# EAGLE board schematic (EAGLE 9.6.2)
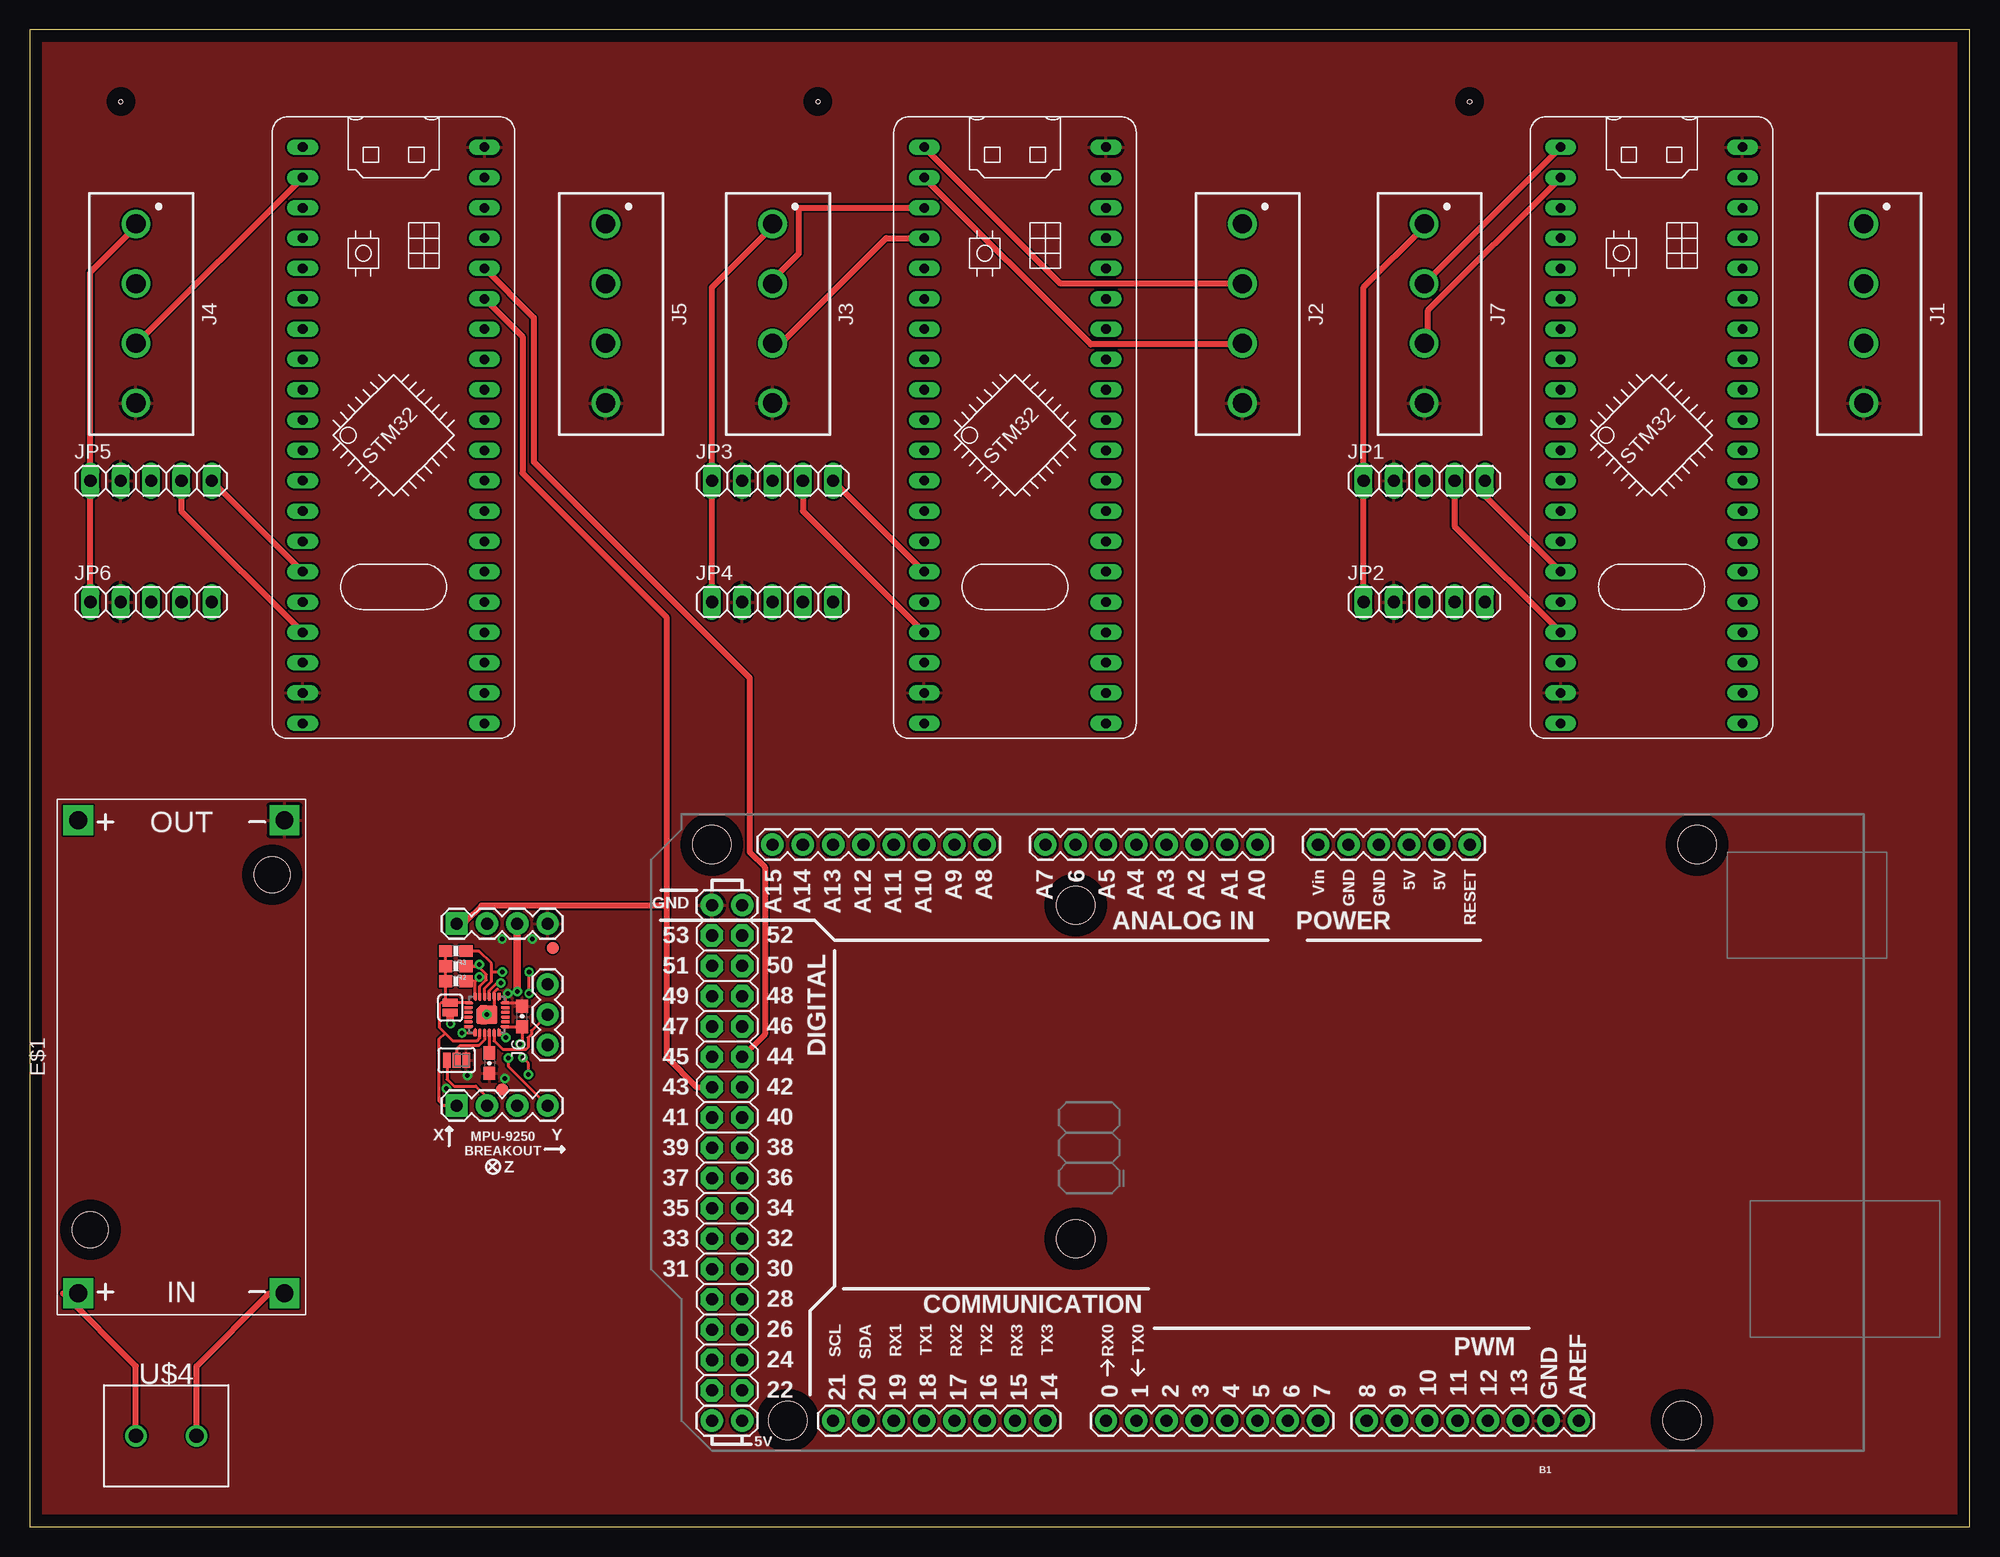
[diagram p0: board, top side]
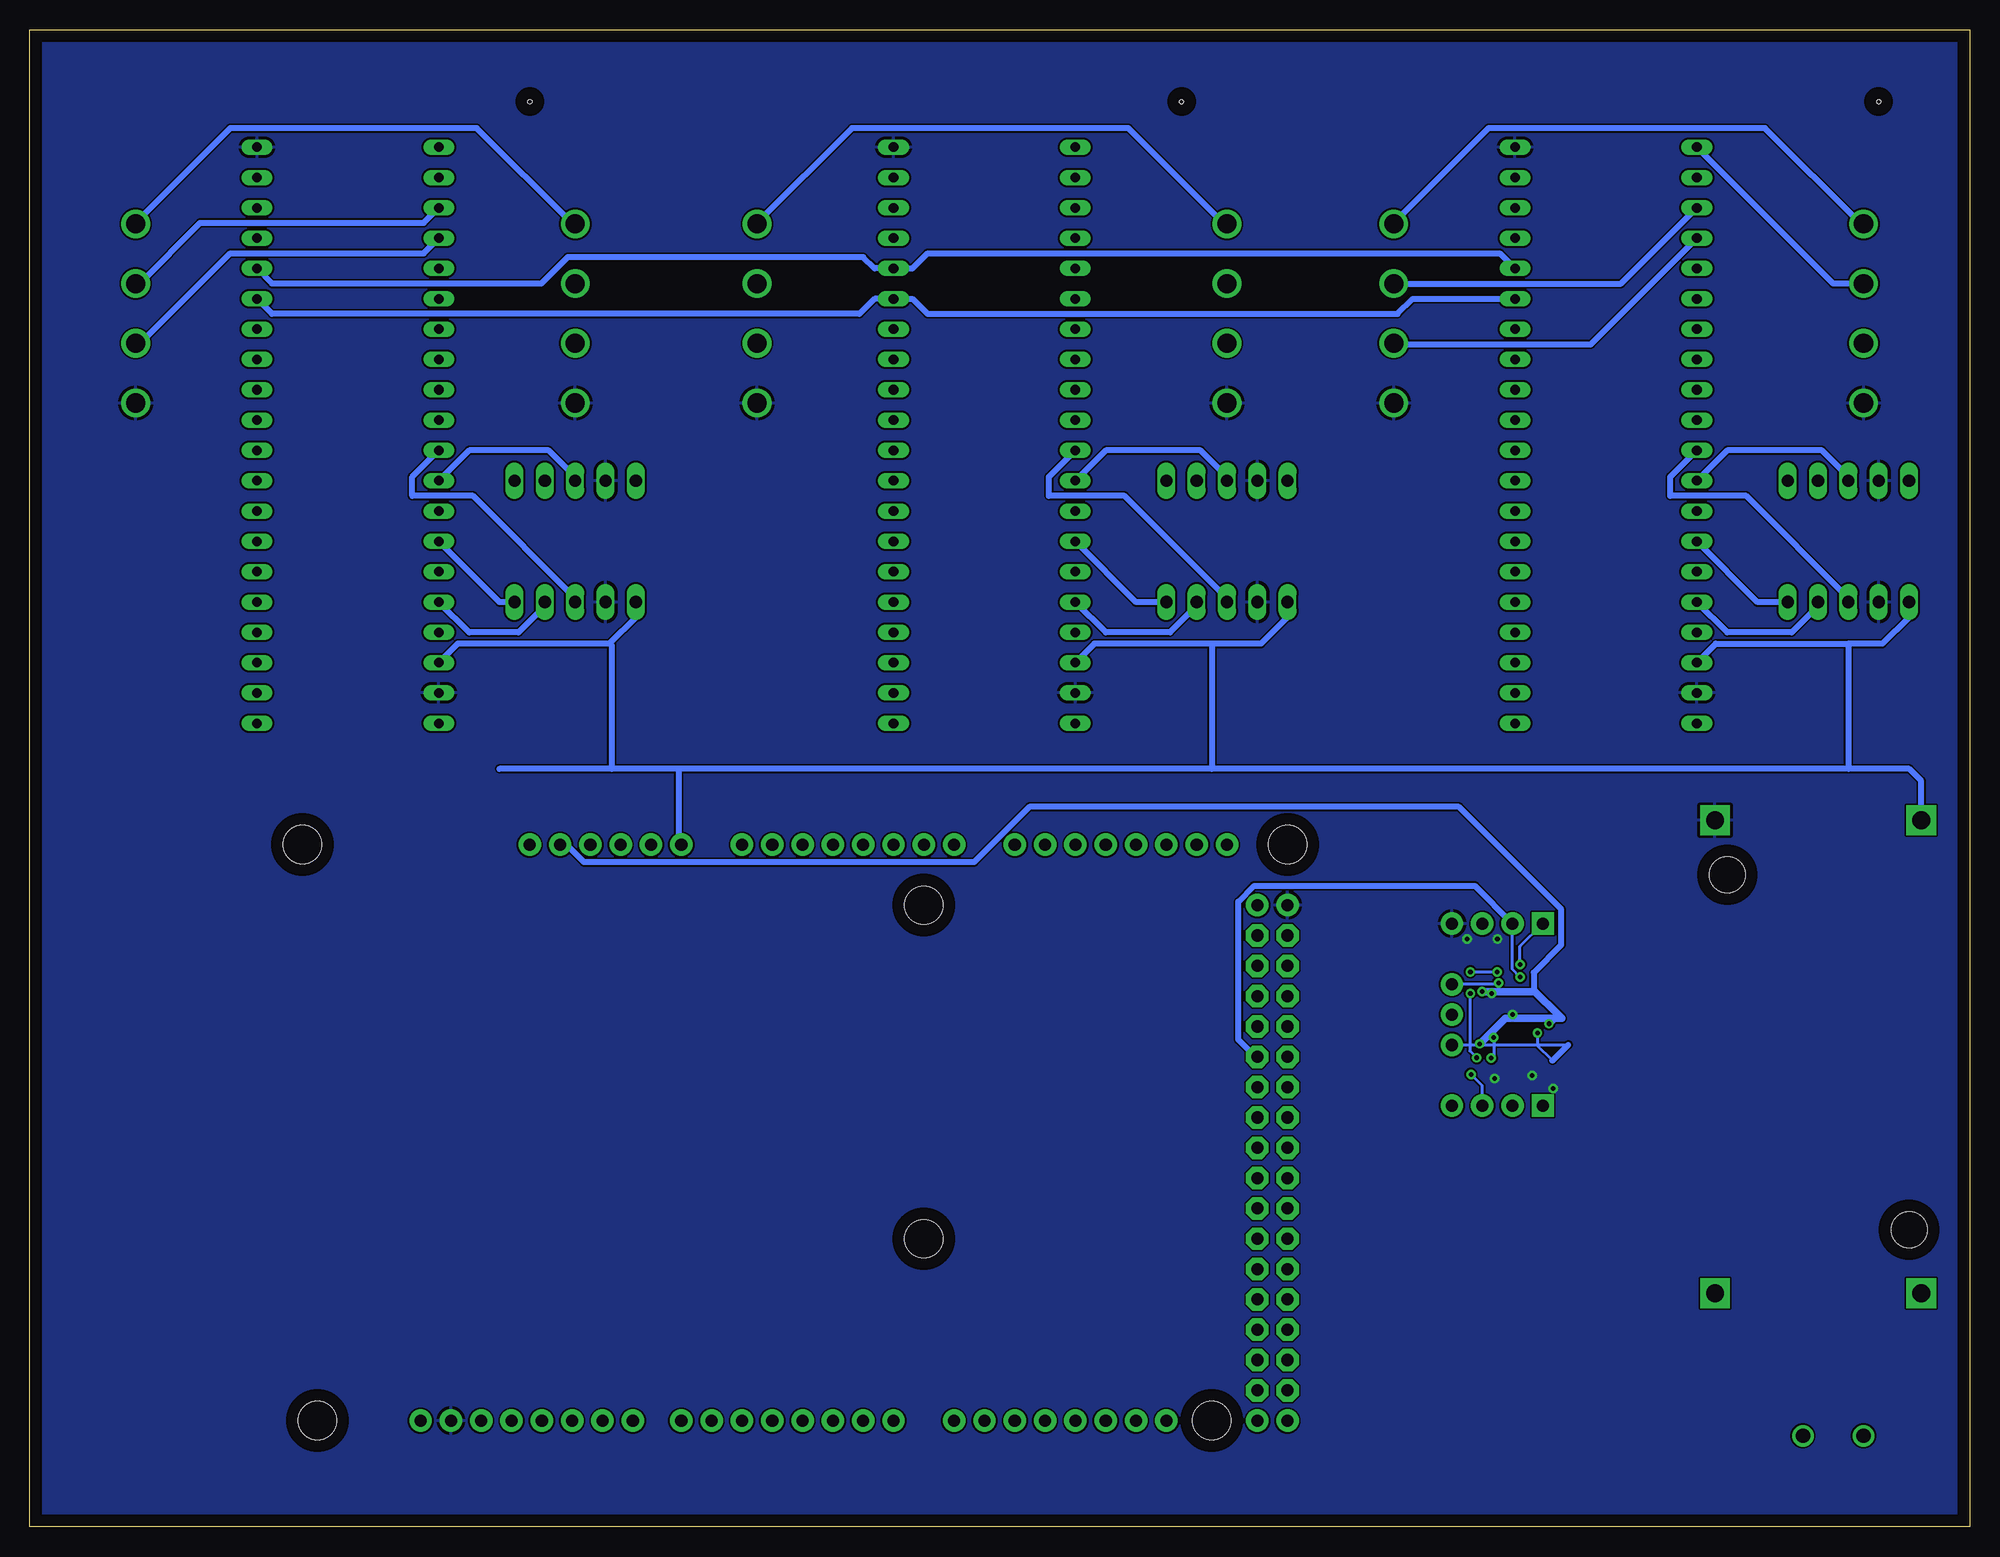
[diagram p1: board, bottom side, seen from below]

Size 162.54 x 125.4 mm. Coordinates in mm from the lower left corner, seen from the top.
Outline: 0,0 162.54,0 162.54,125.4 0,125.4 0,0
Copper layers (1*16): Top 0.035mm / dielectric 1.5mm / Bottom 0.035mm
Design rules "default *": minimum track width 20mil, minimum drill 0.35mm, track to track 6mil, track to pad 6mil, pad to pad 6mil, via to via 6mil, smd to smd 6mil, copper to edge 40mil, drill to drill 6mil, minimum pad ring 10mil, minimum via ring 8mil, stop-mask expansion 4mil, vias tented up to drill 0mil, thermal gap 10mil
Holes 0.35 mm at 7.62,119.38 66.04,119.38 120.65,119.38

## Footprints (pad centres in the part's own frame; a part is rotated, then mirrored left to right if it is on the bottom)
ARDUINO_MEGA = drill 1.016 pad 1.88: 0 13.97,24.13; 1 11.43,24.13; 2 8.89,24.13; 3 6.35,24.13; 3.3V -13.97,-24.13; 4 3.81,24.13; 5 1.27,24.13; 5V@0 -11.43,-24.13; 5V@1 44.45,24.13; 5V@2 46.99,24.13; 6 -1.27,24.13; 7 -3.81,24.13; 8 -7.874,24.13; 9 -10.414,24.13; 10 -12.954,24.13; 11 -15.494,24.13; 12 -18.034,24.13; 13 -20.574,24.13; 14 19.05,24.13; 15 21.59,24.13; 16 24.13,24.13; 17 26.67,24.13; 18 29.21,24.13; 19 31.75,24.13; 20 34.29,24.13; 21 36.83,24.13; A0 1.27,-24.13; A1 3.81,-24.13; A2 6.35,-24.13; A3 8.89,-24.13; A4 11.43,-24.13; A5 13.97,-24.13; A6 16.51,-24.13; A7 19.05,-24.13; A8 24.13,-24.13; A9 26.67,-24.13; A10 29.21,-24.13; A11 31.75,-24.13; A12 34.29,-24.13; A13 36.83,-24.13; A14 39.37,-24.13; A15 41.91,-24.13; AREF -25.654,24.13; GND@0 -8.89,-24.13; GND@1 -6.35,-24.13; GND@2 44.45,-19.05; GND@3 46.99,-19.05; GND@4 -23.114,24.13; RESET -16.51,-24.13; VIN -3.81,-24.13 | drill 1.016 pad 1.88 octagon: 22 44.45,21.59; 23 46.99,21.59; 24 44.45,19.05; 25 46.99,19.05; 26 44.45,16.51; 27 46.99,16.51; 28 44.45,13.97; 29 46.99,13.97; 30 44.45,11.43; 31 46.99,11.43; 32 44.45,8.89; 33 46.99,8.89; 34 44.45,6.35; 35 46.99,6.35; 36 44.45,3.81; 37 46.99,3.81; 38 44.45,1.27; 39 46.99,1.27; 40 44.45,-1.27; 41 46.99,-1.27; 42 44.45,-3.81; 43 46.99,-3.81; 44 44.45,-6.35; 45 46.99,-6.35; 46 44.45,-8.89; 47 46.99,-8.89; 48 44.45,-11.43; 49 46.99,-11.43; 50 44.45,-13.97; 51 46.99,-13.97; 52 44.45,-16.51; 53 46.99,-16.51 | hole 3.2: -34.29,24.13; -35.56,-24.13; 16.51,8.89; 16.51,-19.05; 40.64,24.13; 46.99,-24.13
0603-CAP = smd 1.1 x 1: 1 -0.85,0; 2 0.85,0
DC-DC-STEP-DOWN-LM2596 = drill 1.5 pad 2.5 square: IN+ -19.812,8.636; IN- -19.812,-8.636; OUT+ 19.812,8.636; OUT- 19.812,-8.636 | hole 3: -14.478,7.62; 15.24,-7.62
FIDUCIAL-1X2 = smd 1 x 1: 1 0,0
691311700004 = drill 1.6: 1 -7.54,0; 2 -2.54,0; 3 2.46,0; 4 7.46,0
1X03 = drill 1.016 pad 1.88: 1 0,0; 2 2.54,0; 3 5.08,0
1X04 = drill 1.016 pad 1.88 square: 1 0,0 | drill 1.016 pad 1.88: 2 2.54,0; 3 5.08,0; 4 7.62,0
1X05 = drill 1.016 long: 1 -5.08,0; 2 -2.54,0; 3 0,0; 4 2.54,0; 5 5.08,0
0603-RES = smd 1.1 x 1: 1 -0.85,0; 2 0.85,0
PAD-JUMPER-2-NC_BY_PASTE_YES_SILK_FULL_BOX = smd 0.635 x 1.27: 1 -0.412,0; 2 0.412,0
PAD-HUMPER-3-1&2_NC_BY_PASTE_YES_SILK_FULL_BOX = smd 0.635 x 1.27: 1 -0.813,0; 2 0,0; 3 0.813,0
QFN24_PAD = smd 0.5 x 0.25: 1 -1.55,1; 2 -1.55,0.6; 3 -1.55,0.2; 4 -1.55,-0.2; 5 -1.55,-0.6; 6 -1.55,-1; 13 1.55,-1; 14 1.55,-0.6; 15 1.55,-0.2; 16 1.55,0.2; 17 1.55,0.6; 18 1.55,1 | smd 0.08 x 0.13: 1$1 -1.32,1.06; 1$3 -1.26,0.94; P$33 1.26,-0.94; P$34 1.32,-1.06; P$58 1.26,0.94; P$59 1.32,1.06; P$68 -1.26,-0.94; P$69 -1.32,-1.06 | smd 0.1 x 0.185 rotated 45: 1$2 -1.25,1.024; P$49 1.024,-1.25 | smd 0.14 x 0.14: 1$4 -1.22,0.945; P$23 -0.945,-1.22; P$24 1.22,-0.945; P$36 0.945,1.22; P$51 0.945,-1.22; P$56 1.22,0.945; P$61 -0.945,1.22; P$66 -1.22,-0.945 | smd 0.05 x 0.05: 1$5 -1.175,0.97; P$25 -0.97,-1.175; P$31 1.175,-0.97; P$37 0.97,1.175; P$52 0.97,-1.175; P$57 1.175,0.97; P$62 -0.97,1.175; P$67 -1.175,-0.97 | smd 0.25 x 0.5: 7 -1,-1.55; 8 -0.6,-1.55; 9 -0.2,-1.55; 10 0.2,-1.55; 11 0.6,-1.55; 12 1,-1.55; 19 1,1.55; 20 0.6,1.55; 21 0.2,1.55; 22 -0.2,1.55; 23 -0.6,1.55; 24 -1,1.55 | smd 0.25 x 0.25: CENTER 0,0 | smd 0.4 x 0.4: DBBADFE -0.675,0.24 | smd 0.6 x 1.2: DBBADFE1 -0.575,-0.195 | smd 0.25 x 0.3: P$1 -0.2,1.3; P$3 0.2,1.3; P$5 0.6,1.3; P$11 -0.6,1.3; P$16 0.2,-1.3; P$18 -0.2,-1.3; P$20 -0.6,-1.3; P$26 0.6,-1.3 | smd 0.3 x 0.25: P$2 -1.3,0.2; P$4 -1.3,0.6; P$28 -1.3,-0.2; P$38 -1.3,-0.6; P$40 1.3,0.2; P$42 1.3,-0.2; P$44 1.3,-0.6; P$50 1.3,0.6 | smd 0.1 x 0.185 rotated 225: P$7 1.25,-1.024; P$60 -1.024,1.25 | smd 1.1 x 1.59: P$13 0.325,0 | smd 0.3 x 0.5 rotated 315: P$14 -0.592,0.512 | smd 0.5 x 1.59: P$15 -0.27,0 | smd 0.1 x 0.185 rotated 135: P$22 -1.024,-1.25; P$55 1.25,1.024 | smd 0.13 x 0.08: P$27 -0.94,-1.26; P$29 -1.06,-1.32; P$39 0.94,1.26; P$41 1.06,1.32; P$53 0.94,-1.26; P$54 1.06,-1.32; P$63 -0.94,1.26; P$64 -1.06,1.32 | smd 0.1 x 0.185 rotated 315: P$35 1.024,1.25; P$65 -1.25,-1.024
BLUE_PILL = drill 0.8 long: P$1 -7.62,15.24; P$2 -7.62,12.7; P$3 -7.62,10.16; P$4 -7.62,7.62; P$5 -7.62,5.08; P$6 -7.62,2.54; P$7 -7.62,0; P$8 -7.62,-2.54; P$9 -7.62,-5.08; P$10 -7.62,-7.62; P$11 -7.62,-10.16; P$12 -7.62,-12.7; P$13 -7.62,-15.24; P$14 -7.62,-17.78; P$15 -7.62,-20.32; P$16 -7.62,-22.86; P$17 -7.62,-25.4; P$18 -7.62,-27.94; P$19 -7.62,-30.48; P$20 -7.62,-33.02; P$21 7.62,15.24; P$22 7.62,12.7; P$23 7.62,10.16; P$24 7.62,7.62; P$25 7.62,5.08; P$26 7.62,2.54; P$27 7.62,0; P$28 7.62,-2.54; P$29 7.62,-5.08; P$30 7.62,-7.62; P$31 7.62,-10.16; P$32 7.62,-12.7; P$33 7.62,-15.24; P$34 7.62,-17.78; P$35 7.62,-20.32; P$36 7.62,-22.86; P$37 7.62,-25.4; P$38 7.62,-27.94; P$39 7.62,-30.48; P$40 7.62,-33.02
TERMBLK_508-2N = drill 1.2: 1 0,0; 2 5.08,0

## Placement (x,y rotation side)
B1  ARDUINO_MEGA_R3FULL  [ARDUINO_MEGA]  104.14,33.02 180 top
C1  0.1uF  [0603-CAP]  38.51,38.84 270 top
C2  0.1uF  [0603-CAP]  41.25,42.75 90 top
E$1  [DC-DC-STEP-DOWN-LM2596]  12.7,39.37 90 top
FID1  FIDUCIAL1X2  [FIDUCIAL-1X2]  43.81,48.49 0 top
FID2  FIDUCIAL1X2  [FIDUCIAL-1X2]  39.57,36.63 0 top
J1  691311700004  [691311700004]  153.67,101.6 270 top
J2  691311700004  [691311700004]  101.6,101.6 270 top
J3  691311700004  [691311700004]  62.23,101.6 270 top
J4  691311700004  [691311700004]  8.89,101.6 270 top
J5  691311700004  [691311700004]  48.26,101.6 270 top
J6  [1X03]  43.38,40.36 90 top
J7  691311700004  [691311700004]  116.84,101.6 270 top
J8  [1X04]  35.76,50.52 0 top
J9  [1X04]  35.76,35.28 0 top
JP1  PINHD-1X5  [1X05]  116.84,87.63 0 top
JP2  PINHD-1X5  [1X05]  116.84,77.47 0 top
JP3  PINHD-1X5  [1X05]  62.23,87.63 0 top
JP4  PINHD-1X5  [1X05]  62.23,77.47 0 top
JP5  PINHD-1X5  [1X05]  10.16,87.63 0 top
JP6  PINHD-1X5  [1X05]  10.16,77.47 0 top
R1  10K  [0603-RES]  35.69,45.69 180 top
R2  10K  [0603-RES]  35.69,46.96 180 top
R3  10K  [0603-RES]  35.69,48.23 180 top
SJ1  JUMPER-PAD-2-NC_BY_PASTEFULL-BOX-SILK  [PAD-JUMPER-2-NC_BY_PASTE_YES_SILK_FULL_BOX]  35.23,43.48 90 top
SJ2  JUMPER_PAD-3-1&2_NC_BY_PASTE  [PAD-HUMPER-3-1&2_NC_BY_PASTE_YES_SILK_FULL_BOX]  35.76,39.09 180 top
U1  MPU-9250  [QFN24_PAD]  38.3,42.9 0 top
U$1  [BLUE_PILL]  135.89,100.33 0 top
U$2  [BLUE_PILL]  82.55,100.33 0 top
U$3  [BLUE_PILL]  30.48,100.33 0 top
U$4  2828XX-2282837-2  [TERMBLK_508-2N]  13.97,7.62 180 top

## Library data of the parts
B1 = SparkFun-Boards
C1 C2 = SparkFun-Capacitors; PROD_ID: CAP-00810
E$1 = diy-modules
FID1 FID2 = SparkFun-Aesthetics
J1-J5 J7 = Wurth_Connectors_WR-TBL Pluggable Connector; DATASHEET-URL: https://www.we-online.com/catalog/datasheet/691311700004.pdf; IR-UL: 20A; IR-VDE: 20A; MOUNT: THT; PART-NUMBER: 691311700004; PINS: 4; PITCH: 5mm; TYPE: Vertical; WORKING-VOLTAGE-UL: 300V (AC); WORKING-VOLTAGE-VDE: 300V (AC)
J6 = SparkFun-Connectors
J8 J9 = SparkFun-Connectors; PROD_ID: CONN-09696
JP1-JP6 = Connector; CATEGORY: CONNECTOR; SUB-CATEGORY: PIN-HEADER
R1-R3 = SparkFun-Resistors; PROD_ID: RES-00824
SJ1 SJ2 = SparkFun-Passives
U1 = Testing; PROD_ID: IC-13192
U$1-U$3 = BluePill
U$4 = Connector; CATEGORY: Connector; DESCRIPTION: 2 Position Wire to Board Terminal Block Horizontal with Board 5.08 mm Through Hole; MANUFACTURER: TE Connectivity; MPN: 282837-2; OPERATING_TEMPERATURE: -40°C to +105°C; PART_STATUS: ACTIVE; ROHS_COMPLIANCE: RoHS Compliant; SERIES: 282837; SUBCATEGORY: Terminal Block; TYPE: Side Wire Entry

## Nets
!CS: J9.3 R3.1 U1.22
AD0/SDO: J9.2 SJ2.3
ADSD_STUB: SJ2.2 U1.9
AUX_CL: J6.1 U1.7
AUX_DA: J6.3 U1.21
FSYNC: J6.2 U1.11
GND: B1.GND@3 B1.GND@4 C1.2 C2.2 E$1.OUT- J1.4 J2.4 J3.4 J4.4 J5.4 J7.4 J8.4 JP1.2 JP2.2 JP3.2 JP4.2 JP5.2 JP6.2 SJ2.1 U1.18 U1.20 U1.CENTER U$1.P$19 U$1.P$21 U$2.P$19 U$2.P$21 U$3.P$19 U$3.P$21
INT: J9.4 U1.12
N$1: U$4.2
N$2: J7.2 U$1.P$1
N$3: J7.3 U$1.P$2
N$4: J1.2 U$1.P$3
N$5: J1.3 U$1.P$4
N$6: J2.2 U$2.P$1
N$7: J2.3 U$2.P$2
N$8: J3.2 U$2.P$3
N$9: J3.3 U$2.P$4
N$10: JP2.5 U$1.P$14
N$11: JP1.5 U$1.P$15
N$12: JP2.4 U$1.P$16
N$13: JP1.4 U$1.P$17
N$14: JP2.3 U$1.P$11
N$15: JP1.3 U$1.P$12
N$16: JP4.5 U$2.P$14
N$17: JP3.5 U$2.P$15
N$18: JP4.4 U$2.P$16
N$19: JP3.4 U$2.P$17
N$20: JP4.3 U$2.P$11
N$21: JP3.3 U$2.P$12
N$22: J4.2 U$3.P$1
N$23: J4.3 U$3.P$2
N$24: J5.2 U$3.P$3
N$25: J5.3 U$3.P$4
N$26: JP6.5 U$3.P$14
N$27: JP5.5 U$3.P$15
N$28: JP6.4 U$3.P$16
N$29: JP5.4 U$3.P$17
N$30: JP6.3 U$3.P$11
N$31: JP5.3 U$3.P$12
N$32: U$4.1
REGOUT: C1.1 U1.10
S$2: B1.3.3V C2.1 J8.3 SJ1.1 U1.13
SCL/SCLK: B1.43 J8.1 R2.1 U1.23 U$1.P$26 U$2.P$26 U$3.P$26
SDA/SDI: B1.44 J8.2 R1.1 U1.24 U$1.P$25 U$2.P$25 U$3.P$25
VDD: B1.VIN E$1.OUT+ J1.1 J2.1 J3.1 J4.1 J5.1 J7.1 JP1.1 JP2.1 JP3.1 JP4.1 JP5.1 JP6.1 U$1.P$18 U$2.P$18 U$3.P$18
VDDIO: J9.1 R1.2 R2.2 R3.2 SJ1.2 U1.1 U1.8

## Tracks (layer width: path | path; a pad name or v marks a point on that pad's centre or on a via)
!CS  (via drill 0.38)
  Top 0.254: R3.1 37.64,48.23 38.68,47.19 38.68,46.49 | U1.22 38.1,45.11 38.68,45.7 38.68,46.49 | 38.68,46.49 v39.59,46.49 | v41.78,37.9 41.78,38.81 v41.3,39.29 | v41.83,44.68 v41.83,46.48
  Bottom 0.254: J9.3 40.84,36.96 v41.78,37.9 | v41.3,39.29 41.89,39.88 41.89,44.58 41.83,44.63 v41.83,44.68 | v41.83,46.48 v41.83,46.49 v39.59,46.49
AD0/SDO
  Top 0.254: SJ2.3 34.95,37.49 35.53,36.91 37.36,36.91 38.3,35.97 J9.2
ADSD_STUB
  Top 0.254: U1.9 38.1,40.8 37.62,40.31 36.02,40.31 35.76,40.06 SJ2.2
AUX_CL  (via drill 0.38)
  Top 0.254: U1.7 36.25,41.35 v36.22,41.38
  Bottom 0.254: v36.22,41.38 36.22,40.31 34.98,39.06 | J6.1 33.63,40.36
  Bottom 0.508: 33.63,40.36 34.92,39.06 34.98,39.06
AUX_DA  (via drill 0.38)
  Top 0.254: U1.21 38.5,44.9 39.17,45.57 v39.47,45.57
  Bottom 0.254: v39.47,45.57 39.6,45.44 J6.3
FSYNC
  Top 0.254: U1.11 38.9,40.7 39.6,40 41.58,40 41.73,40.16 41.73,40.97 42.04,41.27 42.04,41.55 J6.2
GND  (via drill 0.38)
  Top 0.178: U1.20 38.9,44.77
  Top 0.254: U1.20 38.9,43.5 U1.CENTER 37.92,42.9 | 39.85,44.32 U1.18 41.25,43.9 C2.2 | 38.9,44.77 39.19,45.06
  other vias: 38.3,42.9 39.8,37.57 36.65,37.82 40.06,44.68 34.9,36.7 42.11,49.25 39.57,49.25
  pour Top: -7.62,127 -7.62,-2.54 -6.35,-3.81 176.53,-3.81 177.8,-2.54 177.8,124.46 176.53,125.73 175.26,127
  pour Bottom: -8.89,128.27 -8.89,-2.54 -6.35,-5.08 177.8,-5.08 179.07,-3.81 179.07,124.46 175.26,128.27
INT  (via drill 0.38)
  Top 0.254: U1.12 39.52,41.35 v39.88,41 | v40.08,39.27 40.08,38.58 J9.4
  Bottom 0.254: v39.88,41 39.88,39.47 v40.08,39.27
N$1
  Top 0.508: U$4.2 8.89,13.46 2.79,19.56
N$2
  Top 0.508: J7.2 U$1.P$1
N$3
  Top 0.508: U$1.P$2 117.16,101.92 117.16,99.69 116.84,99.38 J7.3
N$4
  Bottom 0.508: U$1.P$3 129.54,109.22 148.27,109.22 153.35,104.14 J1.2
N$5
  Bottom 0.508: U$1.P$4 129.54,106.68 145.73,106.68 153.03,99.38 153.67,99.38 J1.3
N$6
  Top 0.508: U$2.P$1 86.36,104.14 J2.2
N$7
  Top 0.508: U$2.P$2 88.9,99.06 101.6,99.06 J2.3
N$8
  Top 0.508: U$2.P$3 64.45,110.49 64.45,106.68 62.23,104.46 J3.2
N$9
  Top 0.508: U$2.P$4 71.75,107.95 63.18,99.38 62.23,99.38 J3.3
N$10
  Bottom 0.508: U$1.P$14 123.19,77.47 JP2.5
N$11
  Top 0.508: U$1.P$15 121.92,86.36 JP1.5
N$12
  Bottom 0.508: U$1.P$16 125.73,74.93 121.6,74.93 119.38,77.15 JP2.4
N$13
  Top 0.508: U$1.P$17 119.38,83.82 JP1.4
N$14
  Bottom 0.508: U$1.P$11 130.49,87.95 130.49,86.36 125.41,86.36 116.84,77.79 JP2.3
N$15
  Bottom 0.508: U$1.P$12 125.73,90.17 119.06,90.17 116.84,87.95 JP1.3
N$16
  Bottom 0.508: U$2.P$14 69.85,77.47 JP4.5
N$17
  Top 0.508: JP3.5 U$2.P$15
N$18
  Bottom 0.508: U$2.P$16 72.39,74.93 66.99,74.93 64.77,77.15 JP4.4
N$19
  Top 0.508: U$2.P$17 64.77,85.09 JP3.4
N$20
  Bottom 0.508: U$2.P$11 77.15,87.95 77.15,86.36 70.8,86.36 62.23,77.79 JP4.3
N$21
  Bottom 0.508: U$2.P$12 72.39,90.17 64.45,90.17 62.23,87.95 JP3.3
N$22
  Bottom 0.508: U$3.P$1 11.43,104.14 J4.2
N$23
  Top 0.508: U$3.P$2 8.89,99.06 J4.3
N$24
  Bottom 0.508: U$3.P$3 29.21,104.14 J5.2
N$25
  Bottom 0.508: U$3.P$4 31.75,99.06 48.26,99.06 J5.3
N$26
  Bottom 0.508: U$3.P$14 17.78,77.47 JP6.5
N$27
  Top 0.508: JP5.5 U$3.P$15
N$28
  Bottom 0.508: U$3.P$16 20.32,74.93 14.92,74.93 12.7,77.15 JP6.4
N$29
  Top 0.508: U$3.P$17 12.7,85.09 JP5.4
N$30
  Bottom 0.508: U$3.P$11 25.08,87.95 25.08,86.36 18.73,86.36 10.16,77.79 JP6.3
N$31
  Bottom 0.508: U$3.P$12 20.32,90.17 12.38,90.17 10.16,87.95 JP5.3
N$32
  Top 0.508: U$4.1 13.97,13.46 20.07,19.56
REGOUT
  Top 0.254: U1.10 C1.1
S$2  (via drill 0.38)
  Top 0.254: U1.13 C2.1 41.25,40.66 v41.05,40.46
  Top 0.61: SJ1.1 35.23,42.16 v35.25,42.14 | J8.3 v40.84,44.83
  Bottom 0.508: 34.54,42.65 34.54,42.8 34.47,42.88 | 36.53,44.83 36.53,46.43 34.21,48.74 34.21,51.71 42.8,60.3 78.79,60.3 83.41,55.68 116.1,55.68 117.42,57 118.09,57 B1.3.3V
  Bottom 0.61: v35.25,42.14 34.75,42.65 34.54,42.65 34.24,42.65 | v41.05,40.46 38.91,42.6 34.19,42.6 34.47,42.88 36.42,44.83 36.53,44.83 v40.84,44.83
SCL/SCLK  (via drill 0.38)
  Top 0.254: U1.23 37.7,45.27 38.25,45.82 38.25,46.28 37.57,46.96 R2.1 37.52,46.96 v37.67,47.12
  Top 0.508: 53.34,52.05 53.34,76.2 41.28,88.26 41.28,99.69 U$3.P$26 | 53.34,52.05 53.34,39.37 55.88,36.83 B1.43 | 53.34,52.05 37.85,52.05 36.53,50.72 35.86,50.72 J8.1 | 53.36,52.05 53.34,52.05
  Bottom 0.254: v37.67,47.12 37.67,48.62 J8.1
  Bottom 0.508: U$3.P$26 46.67,102.87 47.94,101.6 87.31,101.6 88.58,102.87 U$2.P$26 91.76,102.87 93.03,101.6 142.24,101.6 U$1.P$26
SDA/SDI  (via drill 0.38)
  Top 0.254: U1.24 37.3,45.6 37.21,45.7 | 37.21,45.7 R1.1 | 37.21,45.7 37.31,45.7 v37.67,46.05
  Top 0.508: B1.44 61.59,41.27 61.59,55.24 60.33,56.52 60.33,71.12 42.23,89.22 42.23,101.28 U$3.P$25
  Bottom 0.254: v37.67,46.05 38.3,46.69 J8.2
  Bottom 0.508: U$3.P$25 39.37,106.68 87.31,106.68 88.58,105.41 U$2.P$25 91.76,105.41 92.71,106.36 117.47,106.36 119.7,104.14 142.24,104.14 U$1.P$25 | J8.2 41.48,53.7 59.97,53.7 61.29,52.38 61.29,40.82 59.97,39.5 B1.44
VDD
  Top 0.508: J3.1 62.23,108.9 57.15,103.82 JP3.1 JP4.1 | J4.1 8.89,108.9 5.08,105.09 JP5.1 JP6.1 | J7.1 116.84,108.9 111.76,103.82 JP1.1 JP2.1
  Bottom 0.508: E$1.OUT+ 4.06,62.48 5.08,63.5 10.16,63.5 | 10.16,63.5 63.5,63.5 | J2.1 101.6,109.22 93.66,117.16 70.48,117.16 62.55,109.22 62.23,109.22 J3.1 | U$2.P$18 73.34,73.98 63.5,73.98 | 63.5,73.98 59.37,73.98 57.15,76.2 JP4.1 | 63.5,73.98 63.5,63.5 | J5.1 48.26,109.22 40.32,117.16 17.14,117.16 9.21,109.22 8.89,109.22 J4.1 | JP6.1 5.08,76.2 7.3,73.98 10.16,73.98 | 10.16,73.98 21.27,73.98 U$3.P$18 | 10.16,73.98 10.16,63.5 | 63.5,63.5 108.18,63.5 | 108.18,63.5 113.79,63.5 | 113.79,63.5 123.19,63.5 | J1.1 153.67,109.22 145.73,117.16 125.09,117.16 117.16,109.22 116.84,109.22 J7.1 | U$1.P$18 126.68,73.98 113.98,73.98 113.96,74 | 113.96,74 111.76,76.2 JP2.1 | 108.18,63.5 108.18,57.33 B1.VIN | 113.79,63.5 113.79,73.84 113.96,74
VDDIO
  Top 0.254: SJ1.2 U1.1 34.48,43.9 34.31,43.74 34.31,41.83 34.78,41.36 | SJ1.2 | SJ1.2 34.84,43.9 R1.2 R2.2 R3.2 | 34.78,41.36 35.43,40.72 37.47,40.72 37.7,40.95 U1.8 | J9.1 34.67,35.28 34.31,35.64 34.31,40.89 34.78,41.36
(copper drawn outside any net)
  shapes: Top area x10

## Text on the board
tPlace: X | MPU-9250 / BREAKOUT | Y | Z